# Altium PCB LTC6268_PCB.PcbDoc
Units mm, origin at the board's own origin, x right, y up, seen from the top; angles counter-clockwise.
Board outline 46.8 x 42.34 mm, 2 copper layers (Top Layer, Bottom Layer); 36 components, 28 nets, 91 pads, 1 vias.
Unrouted connection lines stored in the file: 73.
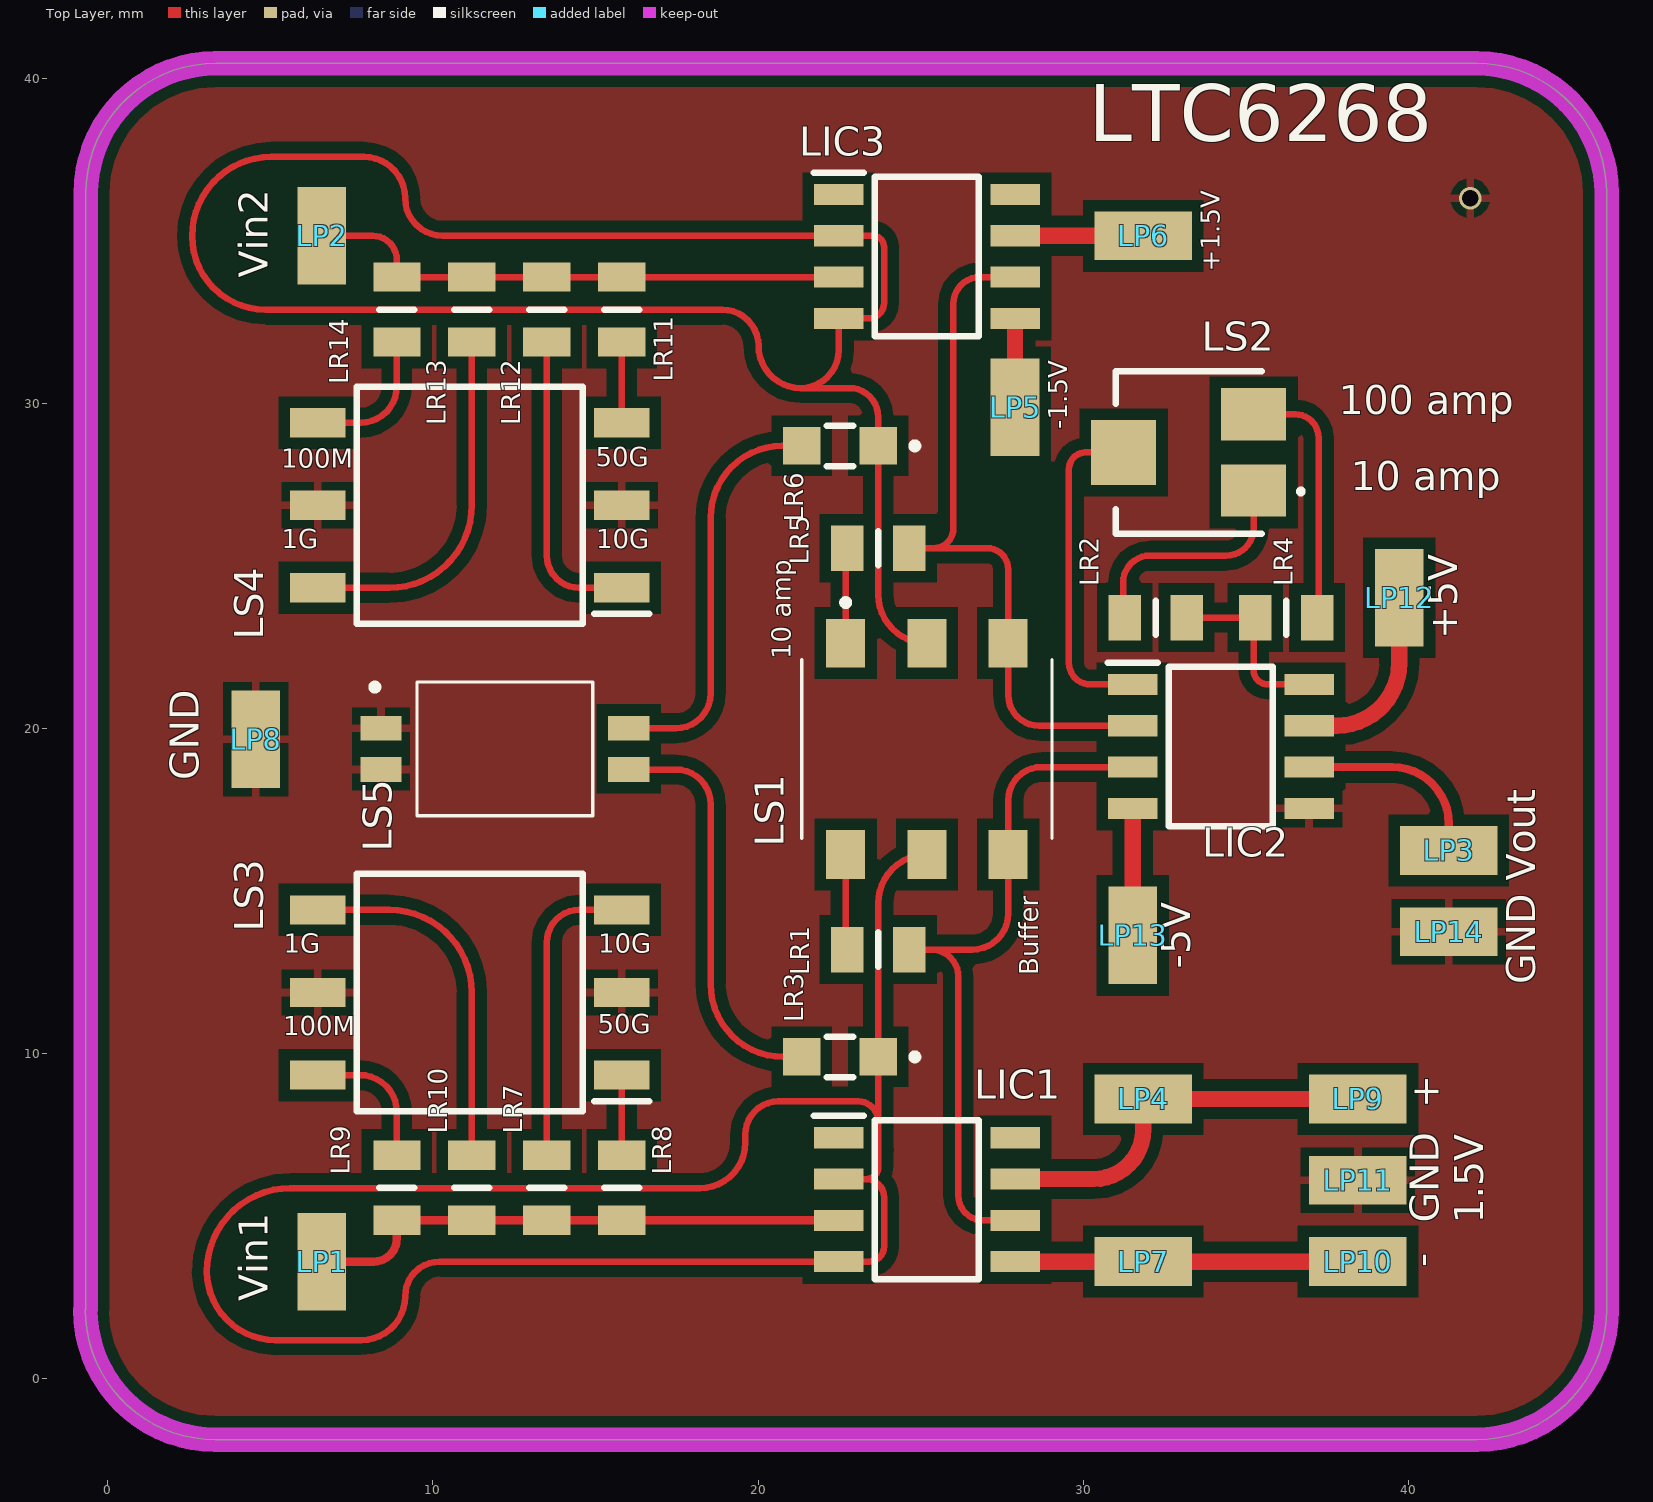
[diagram p0: Top Layer view]
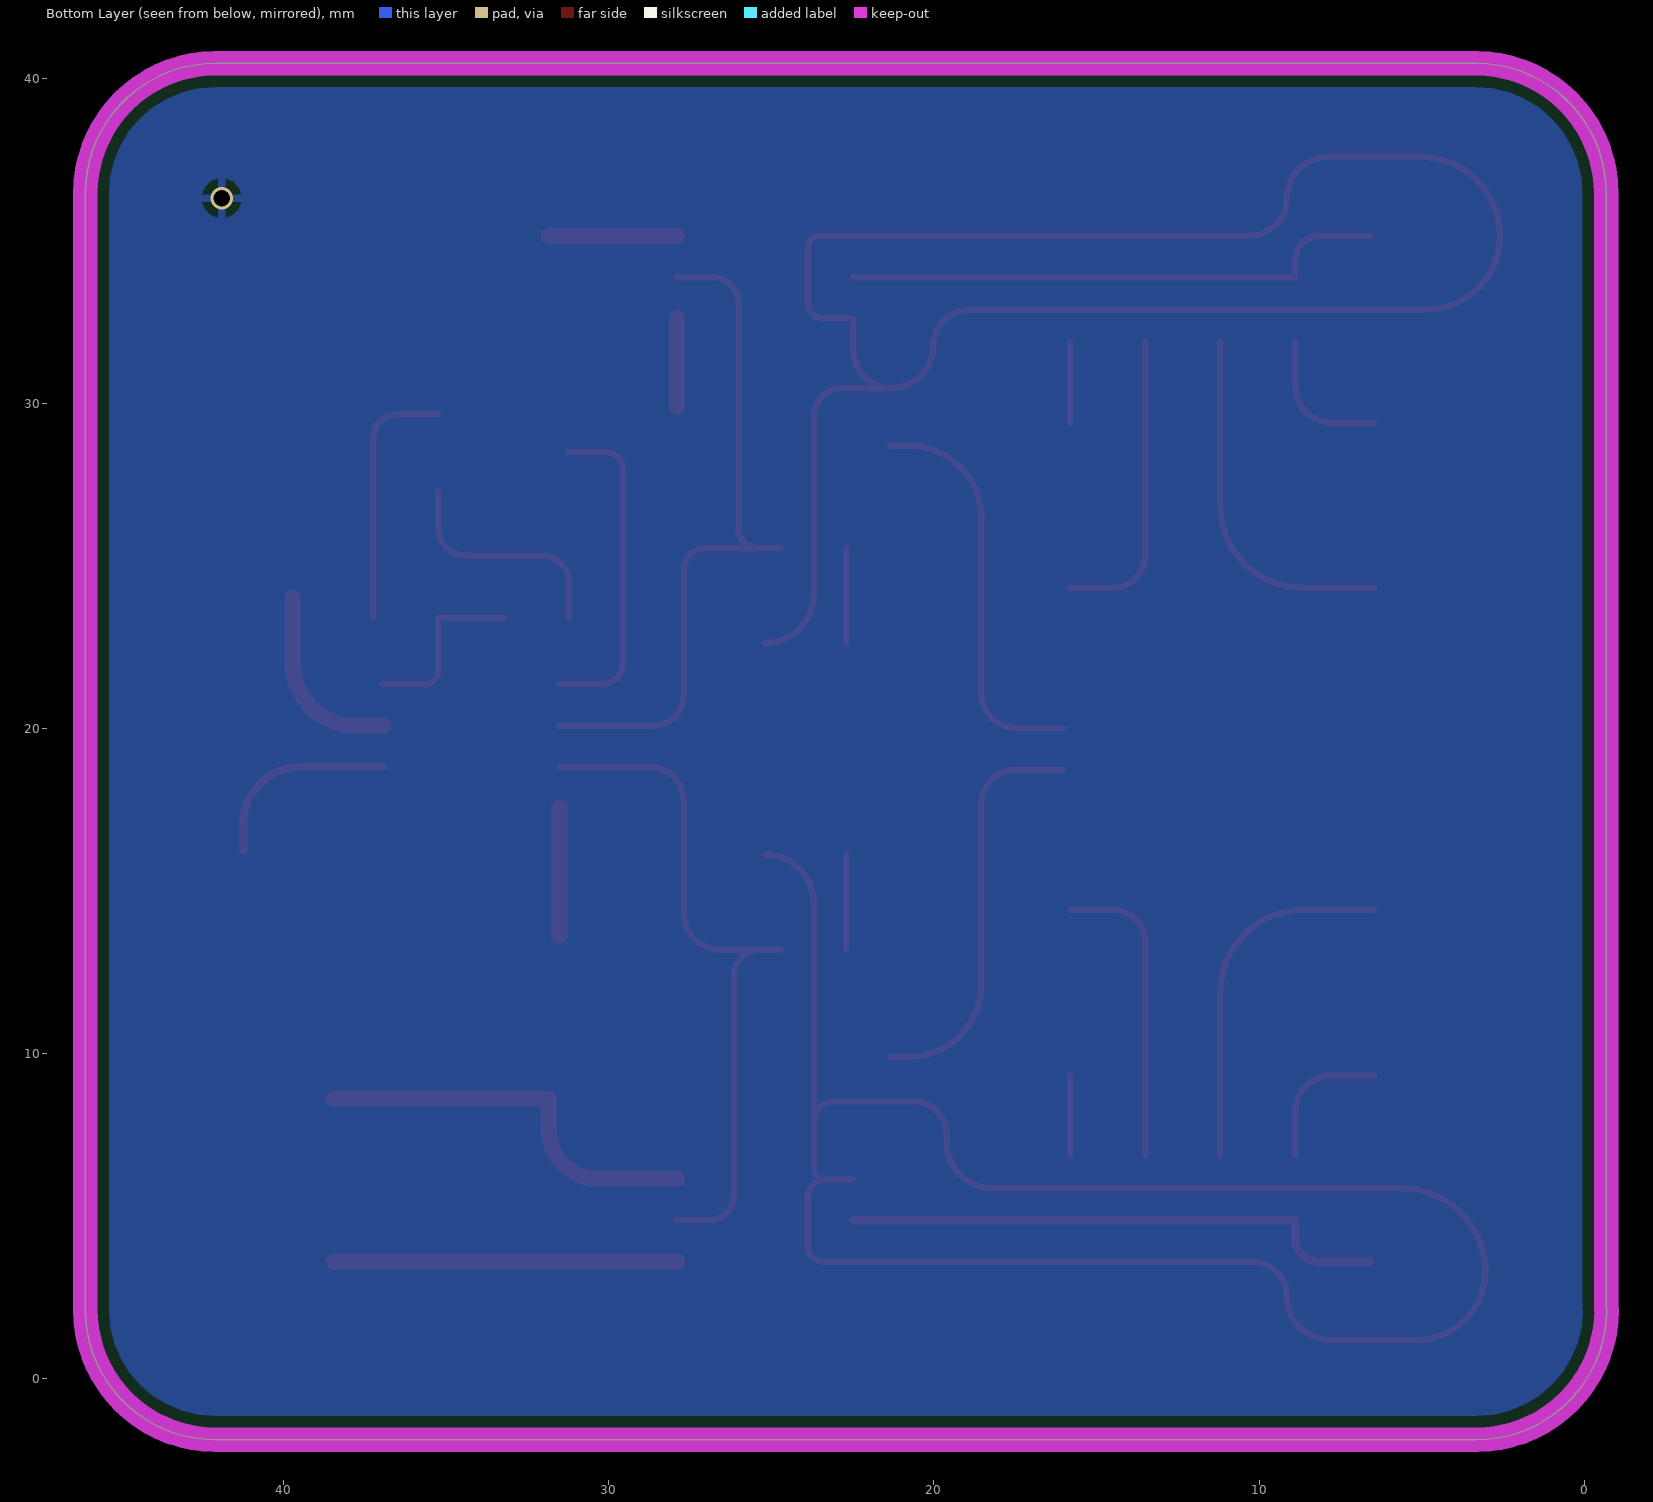
[diagram p1: Bottom Layer view, seen from below]

## Layer stack, top to bottom
Top Solder: solder mask 0.0102, Solder Resist, Dk 3.5
Top Layer: signal copper 0.0356
Dielectric 1: dielectric 0.32, FR-4, Dk 4.8
Bottom Layer: signal copper 0.0356
Bottom Solder: solder mask 0.0102, Solder Resist, Dk 3.5

## Board outline
-0.693,2.128 -0.68,2.141 -0.68,36.469 cw(c3.32,36.469) 3.32,40.469 42.106,40.469 cw(c42.106,36.469) 46.106,36.469 46.106,2.128 cw(c42.106,2.128) 42.106,-1.872 3.307,-1.872 cw(c3.307,2.128)

## Design rules (kind name [scope] priority, off if disabled: settings)
Clearance [All] p1: gap=0.35 ignorepadtopadclearanceinfootprint=FALSE
PolygonConnect [All] p1: connectstyle=Relief reliefconductorwidth=0.254 reliefentries=4 polygonreliefangle="90 Angle" airgapwidth=0.254
RoutingVias [All] p1: holewidth=0.711 width=1.27 viastyle="Through Hole" minholewidth=0.711 minwidth=1.27 maxholewidth=0.711 maxwidth=1.27
SolderMaskExpansion [All] p1: expansion=0.102 istentingtop=FALSE
Width [All] p1: maxlimit=0.5 minlimit=0.2 preferedwidth=0.2 minimp=50.000000 maximp=50.000000 favimp=50.000000
30 further rules are at their usual default settings.

## Components (designator, comment, footprint, x,y, rotation, side; value= is the part's Value field where it differs from the comment)
LIC1 "LTC6268IS8-10#PBF" SOIC127P599X175-8N 25.197,5.512 r0 top
LIC2 "LT1920IS8#PBF" SOIC127P599X175-8N 34.239,19.456 r0 top
LIC3 "LTC6268IS8-10#PBF" SOIC127P599X175-8N 25.197,34.528 r0 top
LP1 "Pad" Pad 5.715,2.007 r0 top
LP2 "Pad" Pad 7.442,36.763 r180 top
LP3 "Pad" Pad 39.649,17.12 r270 top
LP4 "Pad" Pad 33.452,7.747 r90 top
LP5 "Pad" Pad 28.772,31.496 r180 top
LP6 "Pad" Pad 33.452,34.299 r90 top
LP7 "Pad" Pad 33.452,2.743 r90 top
LP8 "Pad" Pad 5.41,21.28 r180 top
LP9 "Pad" Pad 40.056,7.747 r90 top
LP10 "Pad" Pad 40.056,2.743 r90 top
LP11 "Pad" Pad 40.056,5.245 r90 top
LP12 "Pad" Pad 38.862,22.428 r0 top
LP13 "Pad" Pad 30.664,12.04 r0 top
LP14 "Pad" Pad 39.649,14.618 r270 top
LR1 "CRG0805F270R" RESC2012X65N 23.697,13.208 r0 top
LR2 "CRG0805F4K7" RESC2012X65N 32.233,23.419 r0 top
LR3 "ERJ-HP6F20R0V" ERJHP6D1000V 22.522,9.906 r180 top
LR4 "CRG0805F330R" RESC2012X65N 36.246,23.419 r180 top
LR5 "CRG0805F270R" RESC2012X65N 23.697,25.552 r0 top
LR6 "ERJ-HP6F20R0V" ERJHP6D1000V 22.522,28.702 r180 top
LR7 "RH73X2A10GNTN" RESC2013X50N 13.502,5.877 r90 top
LR8 "RH73X2A50GNTN" RESC2013X50N 15.807,5.877 r90 top
LR9 "RH73H2A100MKTN" RESC2013X50N 8.89,5.877 r90 top
LR10 "RH73W2A1GNTN" RESC2013X50N 11.196,5.877 r90 top
LR11 "RH73X2A50GNTN" RESC2013X50N 15.807,32.893 r270 top
LR12 "RH73X2A10GNTN" RESC2013X50N 13.502,32.893 r270 top
LR13 "RH73W2A1GNTN" RESC2013X50N 11.196,32.893 r270 top
LR14 "RH73H2A100MKTN" RESC2013X50N 8.89,32.893 r270 top
LS1 "452403012014" 452403012014 25.197,19.38 r0 top
LS2 "CS-4-12YA" CS412YA 33.249,28.499 r90 top
LS3 "CS-7-14TB" SOP254P1000X405-6N 11.132,11.887 r180 top
LS4 "CS-7-14TB" SOP254P1000X405-6N 11.132,26.873 r180 top
LS5 "DS05-127-2-02BK-SMT-TR" DS05127202BKSMTTR 12.212,19.38 r270 top

## Footprints (in the part's own frame and the unit in brackets; to place one, negate y for a bottom-side part, rotate by r counter-clockwise, add the part's x,y. Pads: shape width x height; smd on the part's side, far side on the other; paste and mask are expansions set on the pad)
452403012014 [mm]
  rect 1.2x1.5 smd: 1(-2.5,3.25) 2(0,3.25) 3(2.5,3.25) 4(-2.5,-3.25) 5(0,-3.25) 6(2.5,-3.25)
  silkscreen extent -3.85,-2.75 3.85,4.6, body extent -3.85,-2.75 3.85,2.75, height 4.25
CS412YA [mm]
  rect 1.6x2 smd: 1(-1.175,-2) 2(1.175,-2)
  rect 2x2 smd: 3(0,2)
  silkscreen extent -2.5,-3.5 2.5,2.25, body extent -2.5,-2.84 2.5,2.8, height 2.7
DS05127202BKSMTTR [mm]
  rect 0.76x1.27 smd: 1(-0.635,-3.81) 2(-0.635,3.81) 3(0.635,-3.81) 4(0.635,3.81)
  silkscreen extent -2.05,-4.1 2.05,2.7, body extent -2.05,-4.15 2.05,4.15, height 2.4
ERJHP6D1000V [mm]
  rect 1.15x1.15 smd: 1(-1.175,0) 2(1.175,0)
  silkscreen extent -2.4,-0.63 0.4,0.63, body extent -1,-0.63 1,0.63, height 0.7
Pad [mm]
  rect 1.5x3 smd: 0(0.864,1.6)
RESC2012X65N [mm]
  rect 1x1.4 smd: 1(-0.95,0) 2(0.95,0)
  silkscreen extent 0,-0.53 0,0.53
RESC2013X50N [mm]
  rect 0.9x1.45 smd: 1(-1,0) 2(1,0)
  silkscreen extent 0,-0.54 0,0.54
SOIC127P599X175-8N [mm]
  rect 1.526x0.65 smd: 1(-2.712,1.905) 2(-2.712,0.635) 3(-2.712,-0.635) 4(-2.712,-1.905) 5(2.712,-1.905) 6(2.712,-0.635) 7(2.712,0.635) 8(2.712,1.905)
  silkscreen extent -3.47,-2.45 1.6,2.58, body extent -3,-2.45 3,2.45, height 1.75
SOP254P1000X405-6N [mm]
  rect 1.7x0.9 smd: 1(-4.675,2.54) 2(-4.675,0) 3(-4.675,-2.54) 4(4.675,-2.54) 5(4.675,0) 6(4.675,2.54)
  silkscreen extent -5.53,-3.65 3.47,3.65, body extent -4.98,-3.57 4.82,3.63, height 2.93

## Part data
LIC1 LIC3: "Integrated Circuit", Case=SOIC-8, Manufacturer_Name="Analog Devices", Mouser Part Number=584-LTC6268IS8-10PBF, Arrow Part Number=LTC6268IS8-10#PBF, Arrow Price/Stock=https://www.arrow.com/en/products/ltc6268is8-10pbf/analog-devices?region=nac, Datasheet Link=https://datasheet.datasheetarchive.com/originals/distributors/Datasheets_SAMA/eb0bf5824ac521a4901f543e1202dae7.pdf, Height=1.752mm, Manufacturer_Part_Number=LTC6268IS8-10#PBF, Mounting Style=SMD/SMT, Mouser Price/Stock=https://www.mouser.co.uk/ProductDetail/Analog-Devices/LTC6268IS8-10PBF?qs=oahfZPh6IAJW%252BkNj5oLlfA%3D%3D
LIC2: "Integrated Circuit", Case=SOIC-8, Manufacturer_Name="Analog Devices", Mouser Part Number=584-LT1920IS8#PBF, Arrow Part Number=LT1920IS8#PBF, Arrow Price/Stock=https://www.arrow.com/en/products/lt1920is8pbf/analog-devices?region=nac, Datasheet Link=https://datasheet.datasheetarchive.com/originals/distributors/SFDatasheet-4/sf-00091026.pdf, Height=1.752mm, Manufacturer_Part_Number=LT1920IS8#PBF, Mounting Style=SMD/SMT, Mouser Price/Stock=https://www.mouser.co.uk/ProductDetail/Analog-Devices/LT1920IS8PBF?qs=ytflclh7QUWOSod6PqfjSg%3D%3D
LR1 LR5: "Resistor 270", Case="0805 (in)", Manufacturer_Name="TE Connectivity", Mouser Part Number=279-CRG0805F270R, Arrow Part Number=CRG0805F270R, Arrow Price/Stock=https://www.arrow.com/en/products/crg0805f270r/te-connectivity, Datasheet Link=http://www.te.com/commerce/DocumentDelivery/DDEController?Action=showdoc&DocId=Customer+Drawing%7F1623109%7FBA%7Fpdf%7FEnglish%7FENG_CD_1623109_BA.pdf%7F1623109-1, Height=0.65mm, Manufacturer_Part_Number=CRG0805F270R, Mounting Style=SMD/SMT, Mouser Price/Stock=https://www.mouser.com/Search/Refine.aspx?Keyword=279-CRG0805F270R
LR2: "Resistor 4.7k", Case="0805 (in)", Manufacturer_Name="TE Connectivity", Mouser Part Number=279-CRG0805F4K7, Arrow Part Number=CRG0805F4K7, Arrow Price/Stock=https://www.arrow.com/en/products/crg0805f4k7/te-connectivity?region=nac, Datasheet Link=http://www.te.com/commerce/DocumentDelivery/DDEController?Action=showdoc&DocId=Customer+Drawing%7F1623109%7FBA%7Fpdf%7FEnglish%7FENG_CD_1623109_BA.pdf%7F1623109-1, Height=0.65mm, Manufacturer_Part_Number=CRG0805F4K7, Mounting Style=SMD/SMT, Mouser Price/Stock=https://www.mouser.co.uk/ProductDetail/TE-Connectivity-Holsworthy/CRG0805F4K7?qs=VHcS2MTj4gYTCl8bEMP1DQ%3D%3D
LR3 LR6: "Resistor 20", Manufacturer_Name=Panasonic, Datasheet Link=http://industrial.panasonic.com/cdbs/www-data/pdf/RDQ0000/ast-ind-151033.pdf, Height=0.7mm, Manufacturer_Part_Number=ERJ-HP6F20R0V
LR4: "Resistor 330", Case="0805 (in)", Manufacturer_Name="TE Connectivity", Mouser Part Number=279-CRG0805F330R, Arrow Part Number=CRG0805F330R, Arrow Price/Stock=https://www.arrow.com/en/products/crg0805f330r/te-connectivity?region=nac, Datasheet Link=http://www.te.com/commerce/DocumentDelivery/DDEController?Action=showdoc&DocId=Customer+Drawing%7F1623109%7FBA%7Fpdf%7FEnglish%7FENG_CD_1623109_BA.pdf%7F1623109-1, Height=0.65mm, Manufacturer_Part_Number=CRG0805F330R, Mounting Style=SMD/SMT, Mouser Price/Stock=https://www.mouser.co.uk/ProductDetail/TE-Connectivity-Holsworthy/CRG0805F330R?qs=VHcS2MTj4gbLzLJ0%2FI3gmA%3D%3D
LR7 LR12: "Resistor 10G", Case="0805 (in)", Manufacturer_Name="TE Connectivity", Mouser Part Number=279-RH73X2A10GNTN, Arrow Part Number=RH73X2A10GNTN, Arrow Price/Stock=https://www.arrow.com/en/products/rh73x2a10gntn/te-connectivity?region=nac, Datasheet Link=https://ms.componentsearchengine.com/Datasheets/2/RH73X2A10GNTN.pdf, Height=0.5mm, Manufacturer_Part_Number=RH73X2A10GNTN, Mounting Style=SMD/SMT, Mouser Price/Stock=https://www.mouser.co.uk/ProductDetail/TE-Connectivity-Holsworthy/RH73X2A10GNTN?qs=ip69W3eHERU7YDrLGqSvdQ%3D%3D
LR8 LR11: "Resistor 50G", Case="0805 (in)", Manufacturer_Name="TE Connectivity", Mouser Part Number=279-RH73X2A50GNTN, Datasheet Link=http://www.te.com/commerce/DocumentDelivery/DDEController?Action=showdoc&DocId=Data+Sheet%7F1773268%7FA%7Fpdf%7FEnglish%7FENG_DS_1773268_A.pdf%7F1625862-4, Height=0.5mm, Manufacturer_Part_Number=RH73X2A50GNTN, Mounting Style=SMD/SMT, Mouser Price/Stock=https://www.mouser.co.uk/ProductDetail/TE-Connectivity-Holsworthy/RH73X2A50GNTN?qs=ip69W3eHERVWqEnkYPnkdA%3D%3D
LR9 LR14: "Resistor 100M", Case="0805 (in)", Manufacturer_Name="TE Connectivity", Mouser Part Number=279-RH73H2A100MKTN, Arrow Part Number=RH73H2A100MKTN, Arrow Price/Stock=https://www.arrow.com/en/products/rh73h2a100mktn/te-connectivity?region=nac, Datasheet Link=http://www.te.com/commerce/DocumentDelivery/DDEController?Action=showdoc&DocId=Data+Sheet%7F1773268%7FA%7Fpdf%7FEnglish%7FENG_DS_1773268_A.pdf%7F1625856-2, Height=0.5mm, Manufacturer_Part_Number=RH73H2A100MKTN, Mounting Style=SMD/SMT, Mouser Price/Stock=https://www.mouser.co.uk/ProductDetail/TE-Connectivity-Holsworthy/RH73H2A100MKTN?qs=ip69W3eHERW4mrE8f49Fxw%3D%3D
LR10 LR13: "Resistor 1G", Case="0805 (in)", Manufacturer_Name="TE Connectivity", Mouser Part Number=279-RH73W2A1GNTN, Arrow Part Number=RH73W2A1GNTN, Arrow Price/Stock=https://www.arrow.com/en/products/rh73w2a1gntn/te-connectivity?region=nac, Datasheet Link=https://componentsearchengine.com/Datasheets/2/RH73W2A1GNTN.pdf, Height=0.5mm, Manufacturer_Part_Number=RH73W2A1GNTN, Mounting Style=SMD/SMT, Mouser Price/Stock=https://www.mouser.co.uk/ProductDetail/TE-Connectivity-Holsworthy/RH73W2A1GNTN?qs=ip69W3eHERV4S8tLXHYflA%3D%3D
LS1: "Switch", Manufacturer_Name="Wurth Elektronik", Mouser Part Number=710-452403012014, Datasheet Link=https://katalog.we-online.de/em/datasheet/452403012014.pdf, Height=3.3mm, Manufacturer_Part_Number=452403012014, Mouser Price/Stock=https://www.mouser.co.uk/ProductDetail/Wurth-Elektronik/452403012014?qs=DvsTirrhYfOi0QxHyAEO3w%3D%3D
LS2: "Switch", Manufacturer_Name="NIDEC COPAL", Datasheet Link=https://www.nidec-copal-electronics.com/j/product/detail/00000197/, Height=2.6mm, Manufacturer_Part_Number=CS-4-12YA, Mounting Style=SMD/SMT
LS3 LS4: "Switch", Manufacturer_Name="Copal Electronics", Datasheet Link=https://www.nidec-copal-electronics.com/e/catalog/switch/cs-7.pdf, Height=4.05mm, Manufacturer_Part_Number=CS-7-14TB, Mounting Style=SMD/SMT
LS5: "Switch", Manufacturer_Name="CUI Devices", Mouser Part Number=490-DS05127202BK-STR, Datasheet Link=https://www.cuidevices.com/product/resource/digikeypdf/ds05-127-smt.pdf, Height=2.6mm, Manufacturer_Part_Number=DS05-127-2-02BK-SMT-TR, Mounting Style=SMD/SMT, Mouser Price/Stock=https://www.mouser.co.uk/ProductDetail/CUI-Devices/DS05-127-2-02BK-SMT-TR?qs=wnTfsH77Xs6TIyf6yhikhg%3D%3D

## Via types
v1: diameter 0.7, hole 0.5, Top Layer to Bottom Layer, 1 vias

## Nets (pads, with @x,y where several pads share a name; then routed paths per layer and width w, separated by ;. In a path a pad name is that pad's centre, name@x,y a point inside that pad or via, vN(x,y) a via of type N, cw(c..) or ccw(c..) an arc to the next point about the centre after c; other vN are vias at no path point)
"1st Res (1)": LIC1.2 LIC1.4 LR3.1 LS1.5 | length 62.1
  Top Layer w0.2: LIC1.2 23.317,6.147 ; LS1.5 ccw(c25.197,14.63) 23.697,14.63 LR3.1 23.697,7.926 ; 23.317,6.147 cw(c23.317,5.588) 23.876,5.588 23.876,4.064 cw(c23.419,4.064) 23.419,3.607 LIC1.4 10.211,3.607 ccw(c10.211,2.54) 9.144,2.54 cw(c7.798,2.54) 7.798,1.194 5.156,1.194 cw(c5.156,3.302) 3.048,3.302 cw(c5.613,3.302) 5.613,5.867 18.212,5.867 ccw(c18.212,7.264) 19.609,7.264 19.609,7.518 cw(c20.625,7.518) 20.625,8.534 23.089,8.534 cw(c23.089,7.926) 23.697,7.926 ; 23.317,6.147 23.343,6.147 ccw(c23.343,6.501) 23.697,6.501 23.697,7.057 ; 23.697,7.057 cw(c23.897,7.056) 23.697,7.066 ; 23.697,7.057 cw(c23.897,7.056) 23.697,7.066 ; 23.697,7.066 ccw(c23.248,7.092) 23.698,7.092 ; 23.697,7.066 ccw(c23.248,7.092) 23.698,7.092 ; 23.697,7.768 cw(c23.897,7.778) 23.697,7.777 ; 23.697,7.768 cw(c23.897,7.778) 23.697,7.777 ; 23.697,7.768 cw(c23.248,7.742) 23.698,7.742 ; 23.697,7.768 cw(c23.248,7.742) 23.698,7.742 ; 23.697,7.777 23.697,7.926 ; 23.698,7.092 23.698,7.742
"1st Res (2)": LIC3.2 LIC3.4 LR6.1 LS1.2 | length 62.6
  Top Layer w0.2: LS1.2 cw(c25.197,24.13) 23.697,24.13 LR6.1 23.697,29.592 ccw(c22.809,29.592) 22.809,30.48 21.311,30.48 ; 21.311,30.48 cw(c21.311,31.775) 20.015,31.775 ccw(c18.898,31.775) 18.898,32.893 4.851,32.893 cw(c4.851,35.153) 2.591,35.153 cw(c5.029,35.153) 5.029,37.592 7.874,37.592 cw(c7.874,36.322) 9.144,36.322 ccw(c10.303,36.322) 10.303,35.163 LIC3.2 23.536,35.163 cw(c23.536,34.823) 23.876,34.823 23.876,33.096 cw(c23.403,33.096) 23.403,32.623 LIC3.4 22.485,31.654 cw(c21.311,31.654) 21.311,30.48
"2nd Res": LIC2.1 LS2.3 | length 10.3
  Top Layer w0.2: LS2.3 30.074,28.499 ccw(c30.074,27.991) 29.566,27.991 29.566,22.022 ccw(c30.226,22.022) 30.226,21.361 LIC2.1
"10 amp (1)": LR1.1 LS1.4 | length 2.9
  Top Layer w0.2: LR1.1@22.697,13.208 LS1.4
"10 amp (2)": LR5.1 LS1.1 | length 2.9
  Top Layer w0.2: LS1.1 LR5.1@22.697,25.552
"10 amp (2nd)": LR2.1 LS2.1 | length 7.2
  Top Layer w0.2: LR2.1@31.233,23.419 31.233,24.502 cw(c32.055,24.502) 32.055,25.324 34.392,25.324 ccw(c34.392,26.181) 35.249,26.181 LS2.1
"100 amp (2nd)": LR4.1 LS2.2 | length 7.9
  Top Layer w0.2: LS2.2 36.519,29.674 cw(c36.519,28.947) 37.246,28.947 LR4.1@37.246,23.419
+1.5V: LIC1.7 LIC3.7 LP4.0 LP6.0 LP9.0 | length 16.3
  Top Layer w0.5: LIC1.7 30.328,6.147 ccw(c30.328,7.671) 31.852,7.671 LP4.0 LP9.0 ; LIC3.7 LP6.0
+5V: LIC2.7 LP12.0 | length 5.9
  Top Layer w0.5: LIC2.7 37.795,20.091 ccw(c37.795,22.022) 39.726,22.022 LP12.0
-1.5V: LIC1.5 LIC3.5 LP5.0 LP7.0 LP10.0 | length 13.3
  Top Layer w0.5: LIC1.5 LP7.0 LP10.0 ; LP5.0 LIC3.5
-5V: LIC2.4 LP13.0 | length 3.9
  Top Layer w0.5: LP13.0 LIC2.4
"Buffer (1)": LIC1.6 LIC2.3 LR1.2 LS1.6 | length 21.8
  Top Layer w0.2: LR1.2@24.697,13.208 26.594,13.208 ccw(c26.594,14.311) 27.697,14.311 27.697,17.795 cw(c28.724,17.795) 28.724,18.821 LIC2.3 ; 25.324,13.208 cw(c25.324,12.37) 26.162,12.37 26.162,5.639 ccw(c26.924,5.639) 26.924,4.877 LIC1.6
"Buffer (2)": LIC2.2 LIC3.6 LR5.2 LS1.3 | length 21.8
  Top Layer w0.2: LR5.2@24.697,25.552 27.051,25.552 cw(c27.051,24.907) 27.697,24.907 LS1.3 27.697,21.042 ccw(c28.647,21.042) 28.647,20.091 LIC2.2 ; 25.4,25.552 ccw(c25.4,26.162) 26.01,26.162 26.01,33.071 cw(c26.832,33.071) 26.832,33.893 LIC3.6
GND: LIC2.5 LP8.0 LP11.0 LP14.0 LS3.2 LS3.5 LS4.2 LS4.5 LS5.1 LS5.3
  other v1: 41.91,36.322
NetLIC2_8: LIC2.8 LR2.2 LR4.2 | length 5.6
  Top Layer w0.2: LR2.2@33.233,23.419 35.246,23.419 35.246,21.803 ccw(c35.687,21.803) 35.687,21.361 LIC2.8
NetLR7_2: LR7.2 LS3.3 | length 9.4
  Top Layer w0.2: LR7.2 13.502,13.425 cw(c14.503,13.425) 14.503,14.427 LS3.3
NetLR8_2: LR8.2 LS3.1 | length 2.5
  Top Layer w0.2: LR8.2 LS3.1
NetLR9_2: LR9.2 LS3.6 | length 4.4
  Top Layer w0.2: LS3.6 7.747,9.347 cw(c7.747,8.204) 8.89,8.204 LR9.2
NetLR10_2: LR10.2 LS3.4 | length 11.2
  Top Layer w0.2: LS3.4 8.656,14.427 cw(c8.656,11.887) 11.196,11.887 LR10.2
NetLR11_2: LR11.2 LS4.3 | length 2.5
  Top Layer w0.2: LS4.3 LR11.2
NetLR12_2: LR12.2 LS4.1 | length 9.4
  Top Layer w0.2: LR12.2 13.502,25.335 ccw(c14.503,25.335) 14.503,24.333 LS4.1
NetLR13_2: LR13.2 LS4.6 | length 11.2
  Top Layer w0.2: LS4.6 8.656,24.333 ccw(c8.656,26.873) 11.196,26.873 LR13.2
NetLR14_2: LR14.2 LS4.4 | length 4.4
  Top Layer w0.2: LS4.4 7.772,29.413 ccw(c7.772,30.531) 8.89,30.531 LR14.2
Rg1: LR3.2 LS5.4 | length 12.7
  Top Layer w0.2: LS5.4 17.475,18.745 cw(c17.475,17.678) 18.542,17.678 18.542,12.141 ccw(c20.777,12.141) 20.777,9.906 LR3.2
Rg2: LR6.2 LS5.2 | length 12.6
  Top Layer w0.2: LS5.2 17.475,20.015 ccw(c17.475,21.082) 18.542,21.082 18.542,26.492 cw(c20.752,26.492) 20.752,28.702 LR6.2
Vin1: LIC1.3 LP1.0 LR7.1 LR8.1 LR9.1 LR10.1 | length 16.9
  Top Layer w0.254: LP1.0 8.179,3.607 ccw(c8.179,4.318) 8.89,4.318 LR9.1 LR10.1 LR7.1 LR8.1 LIC1.3
Vin2: LIC3.3 LP2.0 LR11.1 LR12.1 LR13.1 LR14.1 | length 16.9
  Top Layer w0.2: LP2.0 8.144,35.163 cw(c8.144,34.417) 8.89,34.417 LR14.1 LR13.1 LR12.1 LR11.1 LIC3.3
Vout: LIC2.6 LP3.0 | length 6.1
  Top Layer w0.254: LIC2.6 39.505,18.821 cw(c39.505,17.077) 41.25,17.077 LP3.0
pads on no net: LIC1.1 LIC1.8 LIC3.1 LIC3.8

## Polygon pours and split planes (outlines as drawn)
GND on Bottom Layer "GND_L02_P003" (solid, pour order 3): -0.711,36.437 cw(c3.339,36.437) 3.339,40.488 42.087,40.488 cw(c42.087,36.473) 46.101,36.473 46.101,2.123 cw(c42.099,2.123) 42.099,-1.88 3.314,-1.88 cw(c3.314,2.146) -0.711,2.146 -0.711,28.092
GND on Top Layer "GND_L01_P000" (solid, remove dead copper, pour order 0): -0.686,36.463 cw(c3.339,36.463) 3.339,40.488 42.087,40.488 cw(c42.087,36.473) 46.101,36.473 46.101,2.123 cw(c42.099,2.123) 42.099,-1.88 3.314,-1.88 cw(c3.314,2.12) -0.686,2.12 -0.686,24.816

## Keep-outs
Keep-Out Layer:
  lines w0.762: 3.307,40.469 42.106,40.469 cw(c42.106,36.469) 46.106,36.469 46.106,2.128 cw(c42.106,2.128) 42.106,-1.872 3.307,-1.872 cw(c3.307,2.128) -0.693,2.128 -0.68,2.141 -0.68,36.469 cw(c3.32,36.469) 3.32,40.469

## Silkscreen, mask and mechanical layers (free items; w line width, h text height)
Top Overlay:
  text "LTC6268" at 30.175,37.49 h3
  text "+1.5V" at 34.409,34.061 h1 r90
  text "Vin2" at 5.207,33.867 h1.52 r90
  text "100 amp" at 37.871,29.388 h1.52
  text "-1.5V" at 29.71,29.21 h1 r90
  text "50G" at 15.011,27.872 h1
  text "100M" at 5.334,27.821 h1
  text "10 amp" at 38.232,27.038 h1.52
  text "1G" at 5.356,25.349 h1
  text "10G" at 15.029,25.349 h1
  text "+5V" at 41.796,22.758 h1.52 r90
  text "10 amp" at 21.207,22.13 h1 r90
  text "GND" at 3.092,18.408 h1.52 r90
  text "Vout" at 44.202,15.316 h1.52 r90
  text "1G" at 5.411,12.908 h1
  text "10G" at 15.084,12.908 h1
  text "-5V" at 33.592,12.624 h1.52 r90
  text "Buffer" at 28.821,12.421 h1 r90
  text "GND" at 44.209,12.141 h1.52 r90
  text "50G" at 15.066,10.427 h1
  text "100M" at 5.389,10.376 h1
  text "+" at 41.237,8.331 h1.52 r90
  text "GND" at 41.237,4.801 h1.52 r90
  text "1.5V" at 42.609,4.775 h1.52 r90
  text "-" at 41.133,3.429 h1.52 r90
  text "Vin1" at 5.207,2.382 h1.52 r90